# Altium PCB FPC2DFPC.PcbDoc
Units mil, origin at the board's own origin, x right, y up, seen from the top; angles counter-clockwise.
Board outline 1574.8 x 1181.1 mil, 2 copper layers (Top Layer, Bottom Layer); 11 components, 21 nets, 106 pads, 8 vias.
Unrouted connection lines stored in the file: 35.
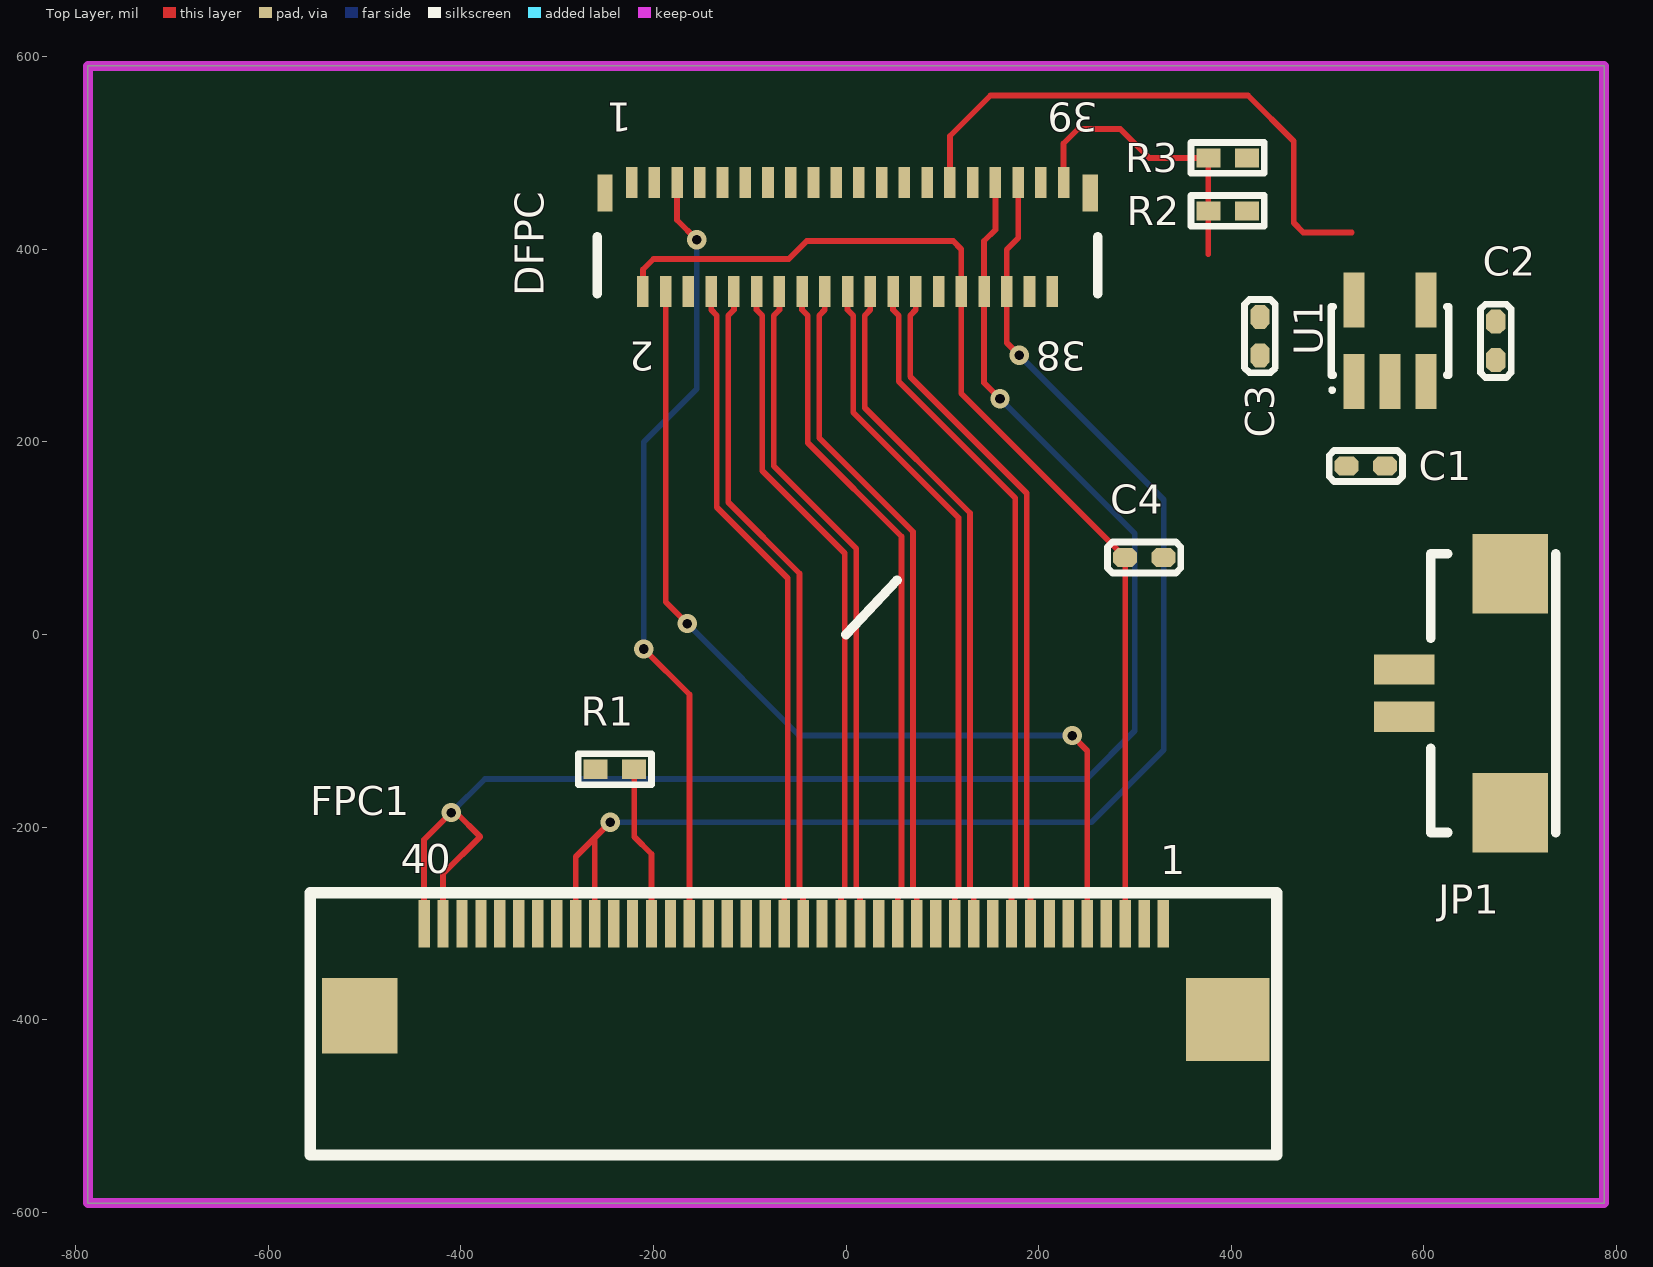
[diagram p0: Top Layer view]
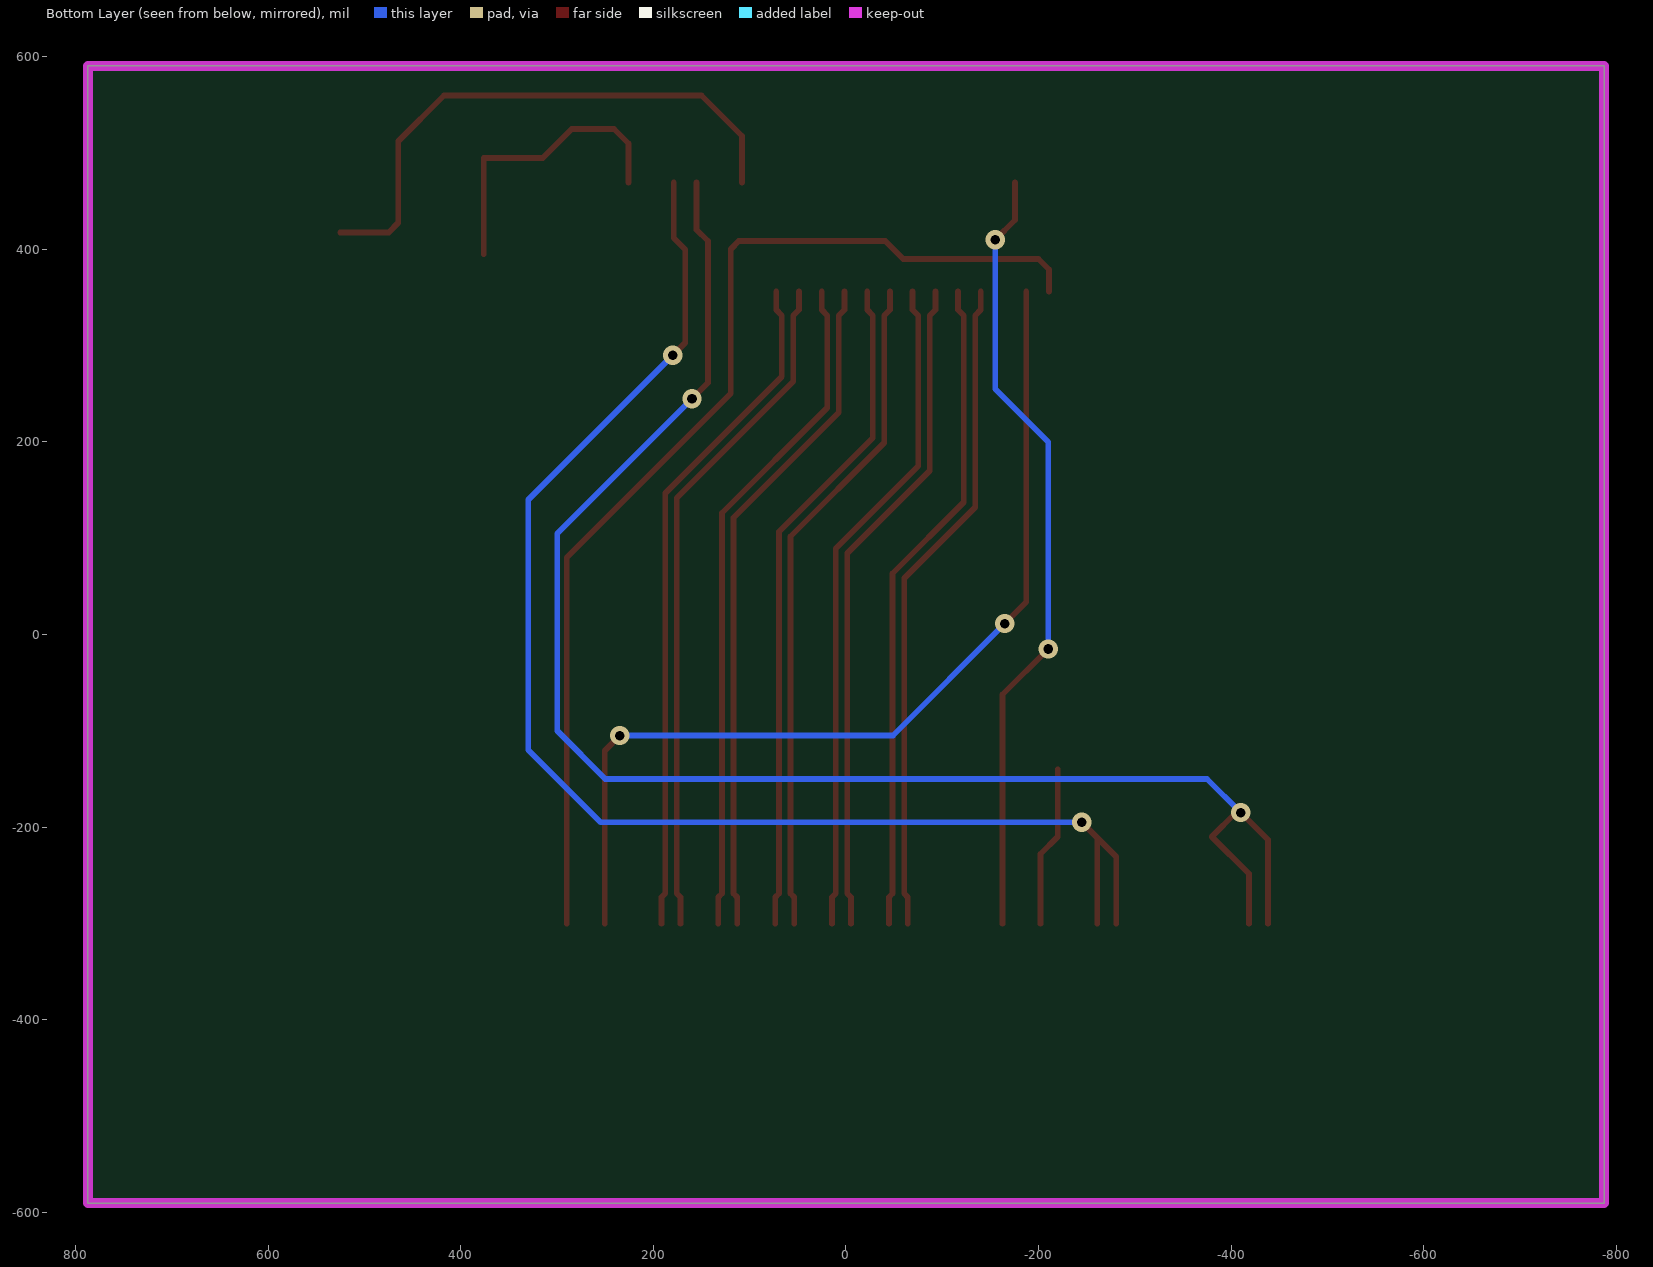
[diagram p1: Bottom Layer view, seen from below]
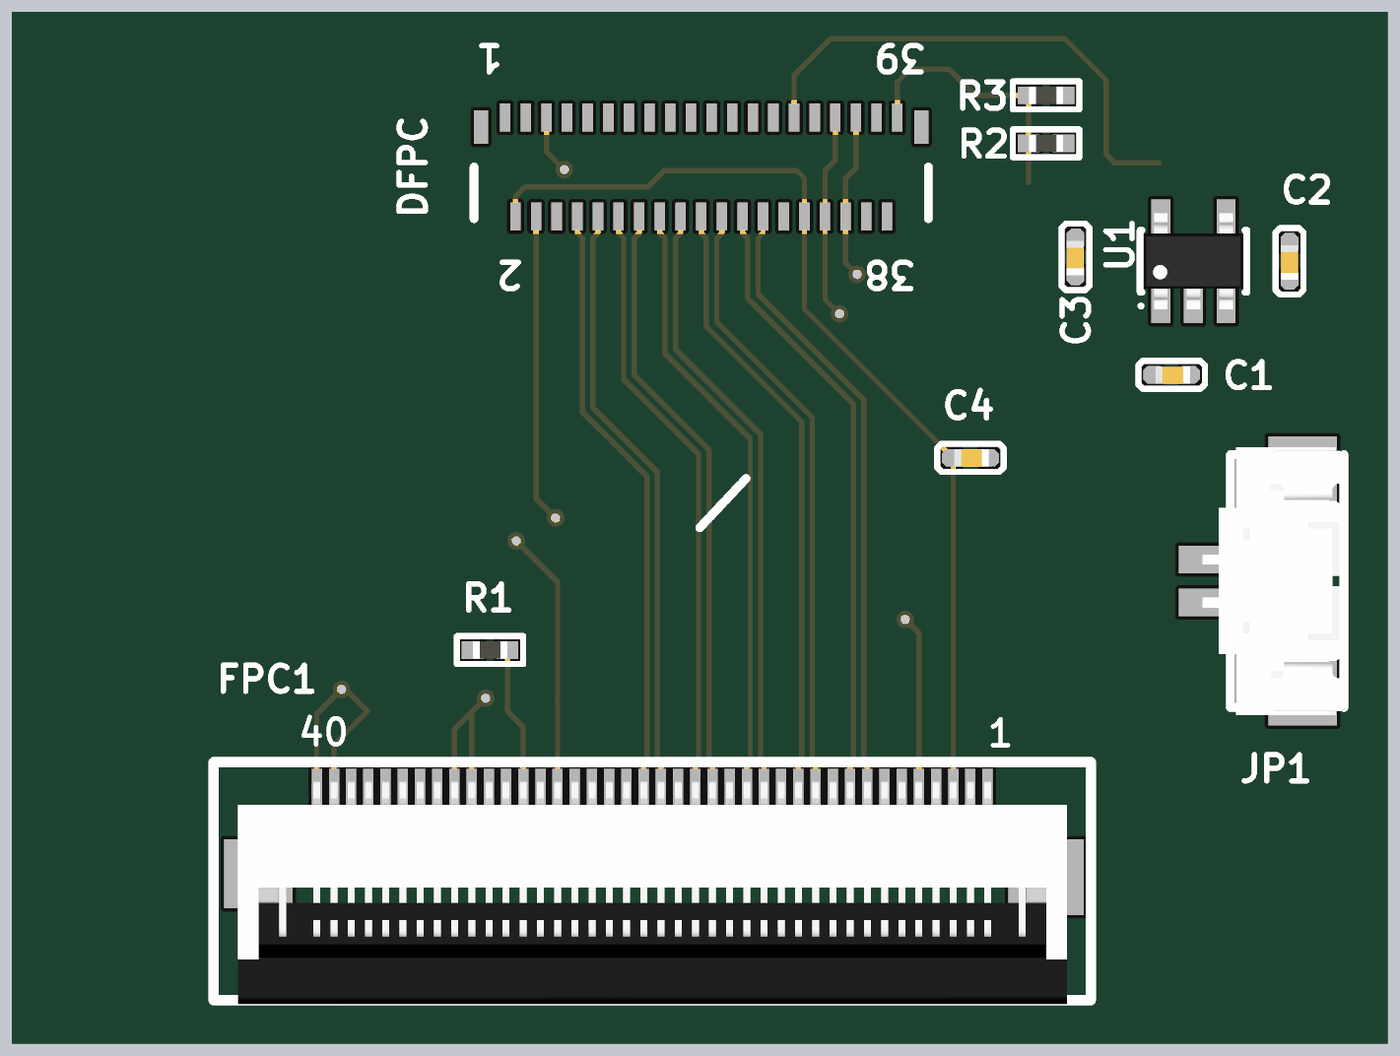
[diagram p2: 3D render of the assembled board from above, using the file's embedded part models]

## Layer stack, top to bottom
Top Solder: solder mask 0.4, Solder Resist, Dk 3.5
Top Layer: signal copper 1.4
Dielectric 1: dielectric 12.6, FR-4, Dk 4.8
Bottom Layer: signal copper 1.4
Bottom Solder: solder mask 0.4, Solder Resist, Dk 3.5

## Board outline
-787.4,-590.55 -787.4,590.55 787.4,590.55 787.4,-590.55

## Design rules (kind name [scope] priority, off if disabled: settings)
Clearance [All] p1: gap=5 ignorepadtopadclearanceinfootprint=FALSE
DiffPairsRouting [All] p1: maxlimit=6 minlimit=6 mostfreqgap=6 toplayer_minwidth=6 toplayer_maxwidth=6 toplayer_prefwidth=6 bottomlayer_minwidth=6 bottomlayer_maxwidth=6 bottomlayer_prefwidth=6 maxuncoupledlength=500
PolygonConnect [All] p1: connectstyle=Relief reliefconductorwidth=10 reliefentries=4 polygonreliefangle="90 Angle" airgapwidth=10
RoutingVias [All] p1: holewidth=28 width=50 viastyle="Through Hole" minholewidth=5 minwidth=10 maxholewidth=28 maxwidth=50
SolderMaskExpansion [All] p1: expansion=4
Width [All] p1: maxlimit=10 minlimit=5 preferedwidth=10
29 further rules are at their usual default settings.

## Classes and differential pairs
differential pair DSI_D3: +DSI_D3_P -DSI_D3_N
differential pair DSI_D2: +DSI_D2_P -DSI_D2_N
differential pair DSI_D1: +DSI_D1_P -DSI_D1_N
differential pair DSI_D0: +DSI_D0_P -DSI_D0_N
differential pair DSI_CLK: +DSI_CLK_P -DSI_CLK_N

## Components (designator, comment, footprint, x,y, rotation, side; value= is the part's Value field where it differs from the comment)
C1 "1uF" 0402_CAP_SMT 540,175.02 r0 top
C2 "10nF" 0402_CAP_SMT 675,305 r270 top
C3 "1uF" 0402_CAP_SMT 430,310 r270 top
C4 "CAP" 0402_CAP_SMT 309.76,80 r0 top value=100nF
DFPC "FPC0.5-SMT-40P-B" DFPC 1.65,412.85 r180 top
FPC1 "FPC0.5-SMT-40P-B" FPC0.5-SMT-40P-B -54.41,-350.26 r180 top
JP1 "HEADER 2" 2PIN_125MM_SMT_VERTICAL 634.88,-60.98 r90 top
R1 "RES" 0402_RES_SMT -240,-140 r180 top value=25k
R2 "RES" 0402_RES_SMT 396.38,440 r180 top value=25k
R3 "RES" 0402_RES_SMT 396.38,495 r0 top value=10k
U1 "SGM2036-2.8" SOT23-5 565,305 r0 top

## Footprints (in the part's own frame and the unit in brackets; to place one, negate y for a bottom-side part, rotate by r counter-clockwise, add the part's x,y. Pads: shape width x height; smd on the part's side, far side on the other; paste and mask are expansions set on the pad)
2PIN_125MM_SMT_VERTICAL [mm]
  rect 0.8x1.6 smd: 1(-0.625,1.4) 2(0.625,1.4)
  rect 2.1x2 smd: ""(-3.15,-1.4) ""(3.15,-1.4)
  silkscreen extent -3.67,-2.6 3.67,0.7, body extent -3.89,-2.66 3.9,1.54, height 4.8
0402_CAP_SMT [mil]
  oct 25x20 smd: 1(-20,0) 2(20,0)
  silkscreen extent -38,-16 38,16, body extent -18,-10 21,10, height 12
0402_RES_SMT [mil]
  rect 25x20 smd: 1(-20,0) 2(20,0)
  silkscreen extent -38,-16 38,16, body extent -20,-10 20,10, height 12
DFPC [mil]
  rect 12x32 smd: 1(224.41,-56.59) 2(212.6,56.59) 3(200.79,-56.59) 4(188.98,56.59) 5(177.17,-56.59) 6(165.35,56.59) 7(153.54,-56.59) 8(141.73,56.59) 9(129.92,-56.59) 10(118.11,56.59) 11(106.3,-56.59) 12(94.49,56.59) 13(82.68,-56.59) 14(70.87,56.59) 15(59.06,-56.59) 16(47.24,56.59) 17(35.43,-56.59) 18(23.62,56.59) 19(11.81,-56.59) 20(0,56.59) 21(-11.81,-56.59) 22(-23.62,56.59) 23(-35.43,-56.59) 24(-47.24,56.59) 25(-59.06,-56.59) 26(-70.87,56.59) 27(-82.68,-56.59) 28(-94.49,56.59) 29(-106.3,-56.59) 30(-118.11,56.59) 31(-129.92,-56.59) 32(-141.73,56.59) 33(-153.54,-56.59) 34(-165.35,56.59) 35(-177.17,-56.59) 36(-188.98,56.59) 37(-200.79,-56.59) 38(-212.6,56.59) 39(-224.41,-56.59)
  rect 16x38 smd: 40(-251.97,-45.77) 40(251.97,-45.77)
  silkscreen extent -260,0 260,59
FPC0.5-SMT-40P-B [mm] "FPC0.5-SMT-40P-B"
  rect 0.3x1.25 smd: 1(-9.75,-1.262) 2(-9.25,-1.262) 3(-8.75,-1.262) 4(-8.25,-1.262) 5(-7.75,-1.262) 6(-7.25,-1.262) 7(-6.75,-1.262) 8(-6.25,-1.262) 9(-5.75,-1.262) 10(-5.25,-1.262) 11(-4.75,-1.262) 12(-4.25,-1.262) 13(-3.75,-1.262) 14(-3.25,-1.262) 15(-2.75,-1.262) 16(-2.25,-1.262) 17(-1.75,-1.262) 18(-1.25,-1.262) 19(-0.75,-1.262) 20(-0.25,-1.262) 21(0.25,-1.262) 22(0.75,-1.262) 23(1.25,-1.262) 24(1.75,-1.262) 25(2.25,-1.262) 26(2.75,-1.262) 27(3.25,-1.262) 28(3.75,-1.262) 29(4.25,-1.262) 30(4.75,-1.262) 31(5.25,-1.262) 32(5.75,-1.262) 33(6.25,-1.262) 34(6.75,-1.262) 35(7.25,-1.262) 36(7.75,-1.262) 37(8.25,-1.262) 38(8.75,-1.262) 39(9.25,-1.262) 40(9.75,-1.262)
  rect 2x2 smd: 41(11.45,1.162)
  rect 2.2x2.2 smd: 42(-11.45,1.262)
  silkscreen extent -12.75,-2.08 12.75,4.84, body extent -12.05,-1.54 12.05,4.96, height 2.2
SOT23-5 [mm] "SOT-23/SC-74A; 5 Leads; Body 3 x 3 mm, inc. leads (LxW max)"
  rect 0.55x1.45 smd: 1(-0.95,-1.075) 2(0,-1.075) 3(0.95,-1.075) 4(0.95,1.075) 5(-0.95,1.075)
  silkscreen extent -1.57,-1.35 1.55,0.9, body extent -1.45,-1.4 1.45,1.4, height 1.45

## Part data
C1 C2 C3: library part CAP, "陶瓷电容"
C4: "陶瓷电容", Dielectric=X5R, Tolerance=10%, Voltage=10V
R1 R2 R3: "贴片电阻", Tolerance=1%, Wattage=1/16W
U1: library part SGM2036, "LDO"

## Via types
v1: diameter 20, hole 10, Top Layer to Bottom Layer, tented both sides, 8 vias

## Nets (pads, with @x,y where several pads share a name; then routed paths per layer and width w, separated by ;. In a path a pad name is that pad's centre, name@x,y a point inside that pad or via, vN(x,y) a via of type N, cw(c..) or ccw(c..) an arc to the next point about the centre after c; other vN are vias at no path point)
1V8: C4.1 DFPC.2 DFPC.30 FPC1.2 FPC1.3 | length 1140.6
  Top Layer w6: DFPC.2 -210.94,379.06 -200,390 -59.57,390 -40.87,408.7 111.3,408.7 119.76,400.24 DFPC.30 119.76,250.24 290.08,79.92 FPC1.3
2V8: C3.1 DFPC.29 R2.1 U1.5 | length 592.1
  Top Layer w6: DFPC.29 107.95,517.95 150,560 417.48,560 465,512.48 465,427.6 475,417.6 525.39,417.6
5V: C1.1 JP1.1 U1.1 U1.3
BIST: FPC1.28 R1.1 | length 168
  Top Layer w6: R1.1 -220,-210 -202.05,-227.95 FPC1.28
DSI_CLK_N: DFPC.18 FPC1.14 | length 701.2
  Top Layer w6: DFPC.18 -21.97,337.26 -27.78,331.45 -27.78,204.24 69.7,106.76 69.7,-269.1 73.54,-272.94 FPC1.14
DSI_CLK_P: DFPC.16 FPC1.15 | length 701.2
  Top Layer w6: DFPC.16 -45.59,337.26 -39.78,331.45 -39.78,199.27 57.7,101.79 57.7,-269.1 53.86,-272.94 FPC1.15
DSI_D0_N: DFPC.26 FPC1.8 | length 711
  Top Layer w6: DFPC.26 72.52,337.26 66.71,331.45 66.71,267.86 187.81,146.76 187.81,-269.1 191.65,-272.94 FPC1.8
DSI_D0_P: DFPC.24 FPC1.9 | length 711
  Top Layer w6: DFPC.24 48.9,337.26 54.71,331.45 54.71,262.89 175.81,141.79 175.81,-269.1 171.97,-272.94 FPC1.9
DSI_D1_N: DFPC.22 FPC1.11 | length 706.1
  Top Layer w6: DFPC.22 25.28,337.26 19.46,331.45 19.46,235.54 128.76,126.24 128.76,-269.1 132.6,-272.94 FPC1.11
DSI_D1_P: DFPC.20 FPC1.12 | length 706.1
  Top Layer w6: DFPC.20 1.65,337.26 7.46,331.45 7.46,230.56 116.76,121.27 116.76,-269.1 112.91,-272.94 FPC1.12
DSI_D2_N: DFPC.14 FPC1.17 | length 696.3
  Top Layer w6: DFPC.14 -69.21,337.26 -75.02,331.45 -75.02,175.02 10.65,89.35 10.65,-269.1 14.49,-272.94 FPC1.17
DSI_D2_P: DFPC.12 FPC1.18 | length 696.3
  Top Layer w6: DFPC.12 -92.83,337.26 -87.02,331.45 -87.02,170.05 -1.35,84.38 -1.35,-269.1 -5.2,-272.94 FPC1.18
DSI_D3_N: DFPC.10 FPC1.20 | length 691.4
  Top Layer w6: DFPC.10 -116.46,337.26 -122.27,331.45 -122.27,137.27 -48.41,63.41 -48.41,-269.1 -44.57,-272.94 FPC1.20
DSI_D3_P: DFPC.8 FPC1.21 | length 691.4
  Top Layer w6: DFPC.8 -140.08,337.26 -134.27,331.45 -134.27,132.3 -60.41,58.44 -60.41,-269.1 -64.25,-272.94 FPC1.21
GND: C1.2 C2.2 C3.2 C4.2 DFPC.1 DFPC.7 DFPC.11 DFPC.15 DFPC.19 DFPC.23 DFPC.27 DFPC.31 DFPC.36 DFPC.40 FPC1.4 FPC1.7 FPC1.10 FPC1.13 FPC1.16 FPC1.19 FPC1.22 FPC1.25 FPC1.30 JP1.2 R1.2 R3.2 U1.2
LEDA: DFPC.32 DFPC.33 FPC1.39 FPC1.40 | length 1658.6
  Top Layer w6: FPC1.40 -438.27,-213.27 v1(-410,-185) -405,-185 -380,-210 -418.58,-248.58 FPC1.39 ; DFPC.33 155.2,420.51 143.39,408.7 DFPC.32 143.39,261.61 v1(160,245)
  Bottom Layer w6: v1(-410,-185) -375,-150 250,-150 300,-100 300,105 v1(160,245)
LEDK: DFPC.34 DFPC.35 FPC1.31 FPC1.32 | length 1477.7
  Top Layer w6: FPC1.32 -280.79,-230.79 -261.1,-211.1 ; FPC1.31 -261.1,-211.1 ; v1(-245,-195) -261.1,-211.1 ; DFPC.35 178.82,411.85 167.01,400.04 DFPC.34 167.01,302.99 v1(180,290)
  Bottom Layer w6: v1(-245,-195) 255,-195 330,-120 330,140 v1(180,290)
NetC2_1: C2.1 U1.4
NetDFPC_39: DFPC.39 R2.2 R3.1 | length 309.5
  Top Layer w6: DFPC.39 226.06,510.04 241.02,525 285,525 315,495 R3.1 376.38,395
RST: DFPC.4 FPC1.5 | length 1004.4
  Top Layer w6: DFPC.4 -187.32,33.62 v1(-165,11.3) ; v1(235,-105) 250.71,-120.71 FPC1.5
  Bottom Layer w6: v1(-165,11.3) -48.7,-105 v1(235,-105)
TE: DFPC.5 FPC1.26 | length 820.9
  Top Layer w6: v1(-210,-15) -162.68,-62.32 FPC1.26 ; DFPC.5 -175.51,430.51 v1(-155,410)
  Bottom Layer w6: v1(-210,-15) -210,200 -155,255 v1(-155,410)
pads on no net: DFPC.3 DFPC.6 DFPC.9 DFPC.13 DFPC.17 DFPC.21 DFPC.25 DFPC.28 DFPC.37 DFPC.38 FPC1.1 FPC1.6 FPC1.23 FPC1.24 FPC1.27 FPC1.29 FPC1.33 FPC1.34 FPC1.35 FPC1.36 FPC1.37 FPC1.38 FPC1.41 FPC1.42 JP1.

## Keep-outs
Keep-Out Layer:
  the board outline again, w10

## Silkscreen, mask and mechanical layers (free items; w line width, h text height)
Top Overlay:
  lines w10: 0,0 53.03,56.4

## Text inside footprints (layer, text, board x,y; h text height)
DFPC: Top Overlay "38" at 249.68,304.09 h30 r180; Top Overlay "39" at 261.5,552.13 h30 r180; Top Overlay "2" at -199.13,304.09 h30 r180; Top Overlay "1" at -222.76,552.13 h30 r180
FPC1: Top Overlay "1" at 326.59,-249.26 h30; Top Overlay "40" at -462.41,-248.26 h30